# Altium PCB io.PcbDoc
Units mil, origin at the board's own origin, x right, y up, seen from the top; angles counter-clockwise.
Board outline 3899.84 x 3710 mil, 2 copper layers (Top Layer, Bottom Layer); 82 components, 45 nets, 216 pads, 36 vias.
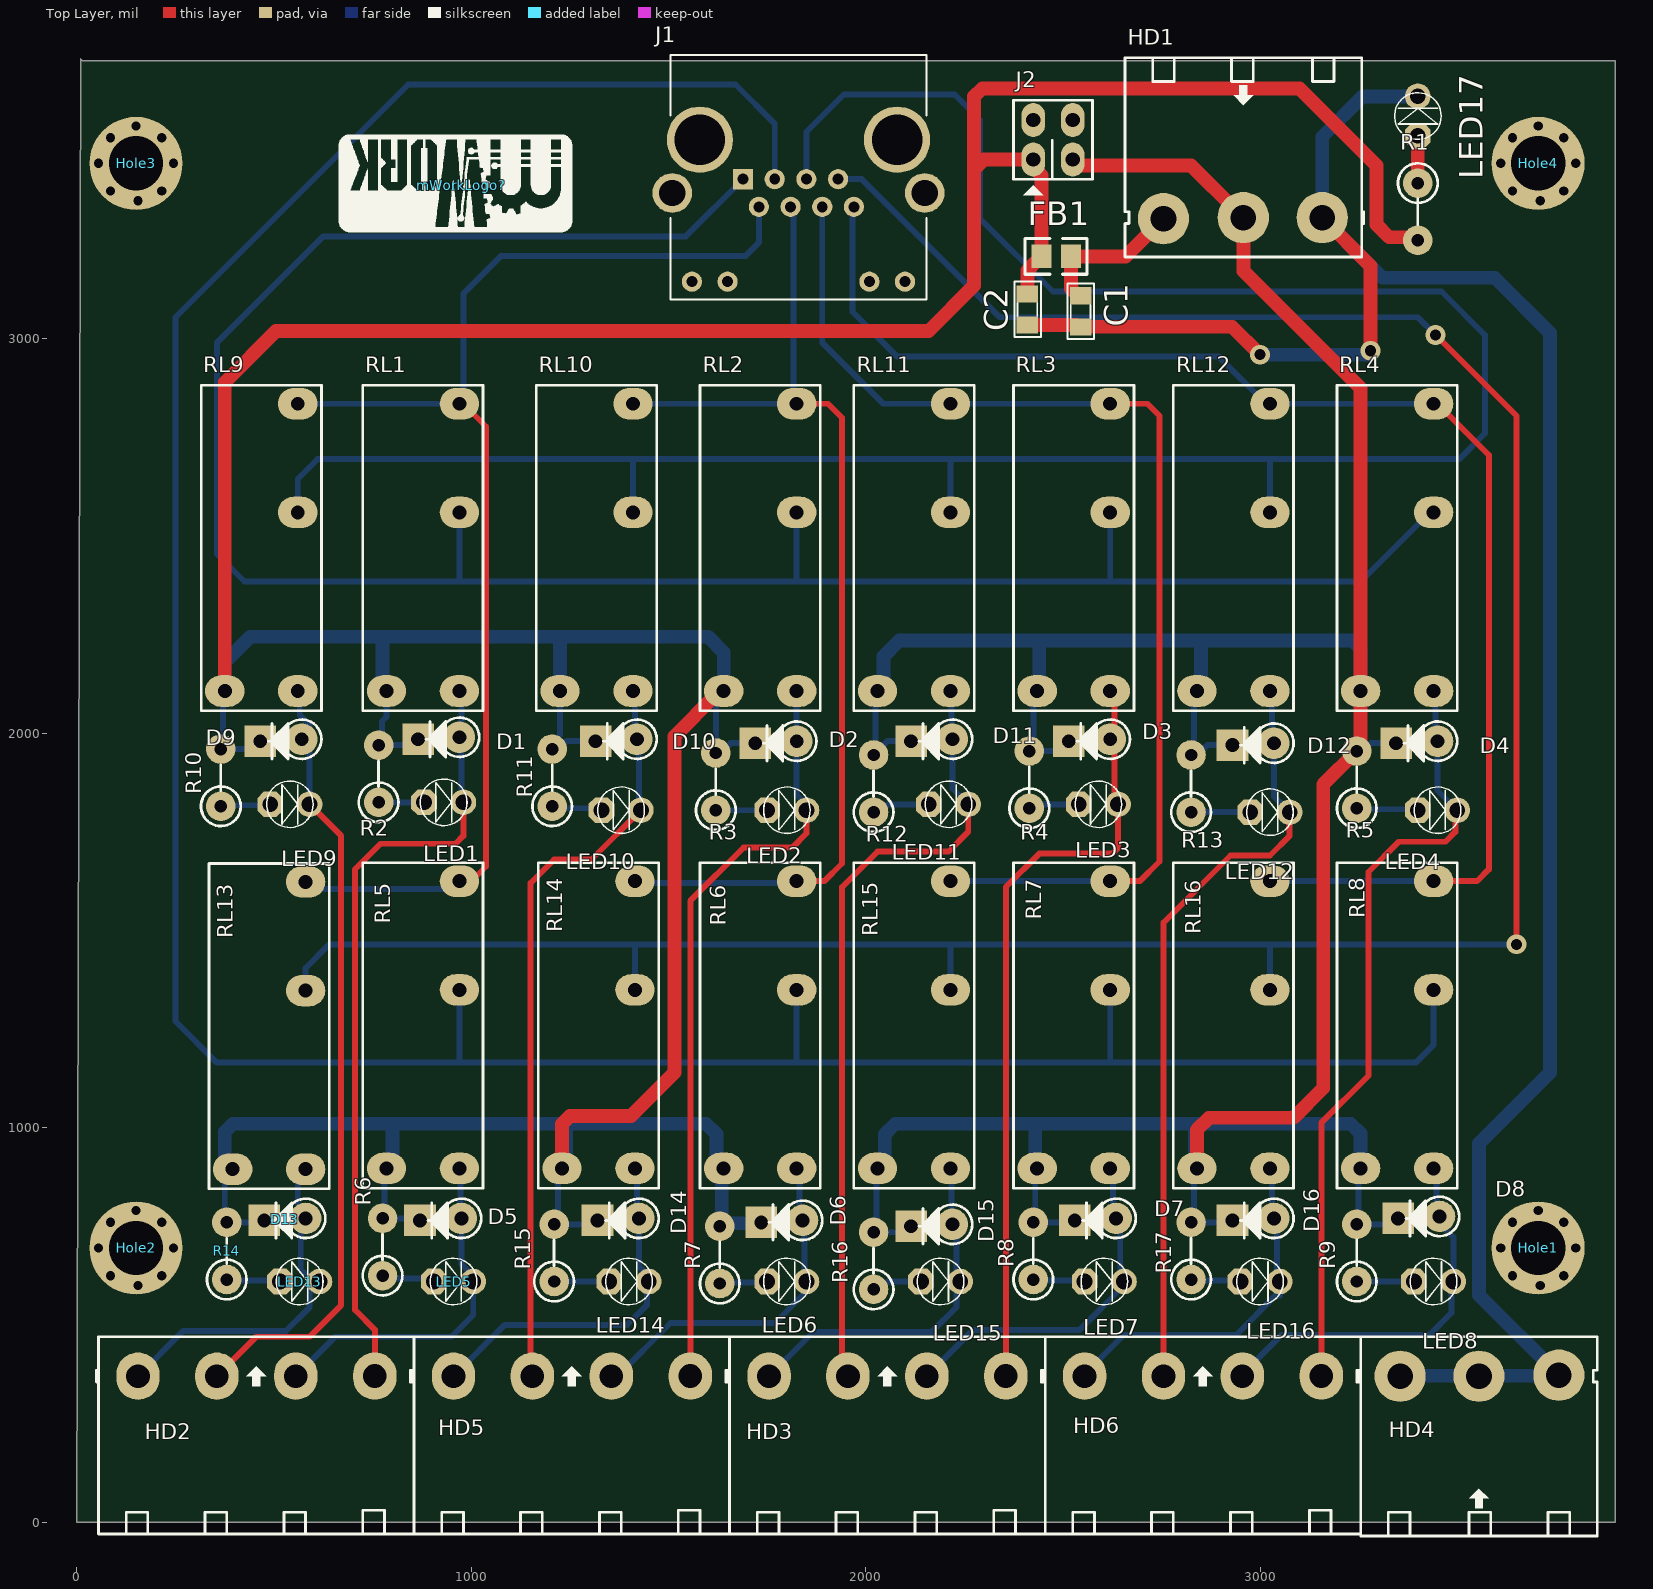
[diagram p0: Top Layer view]
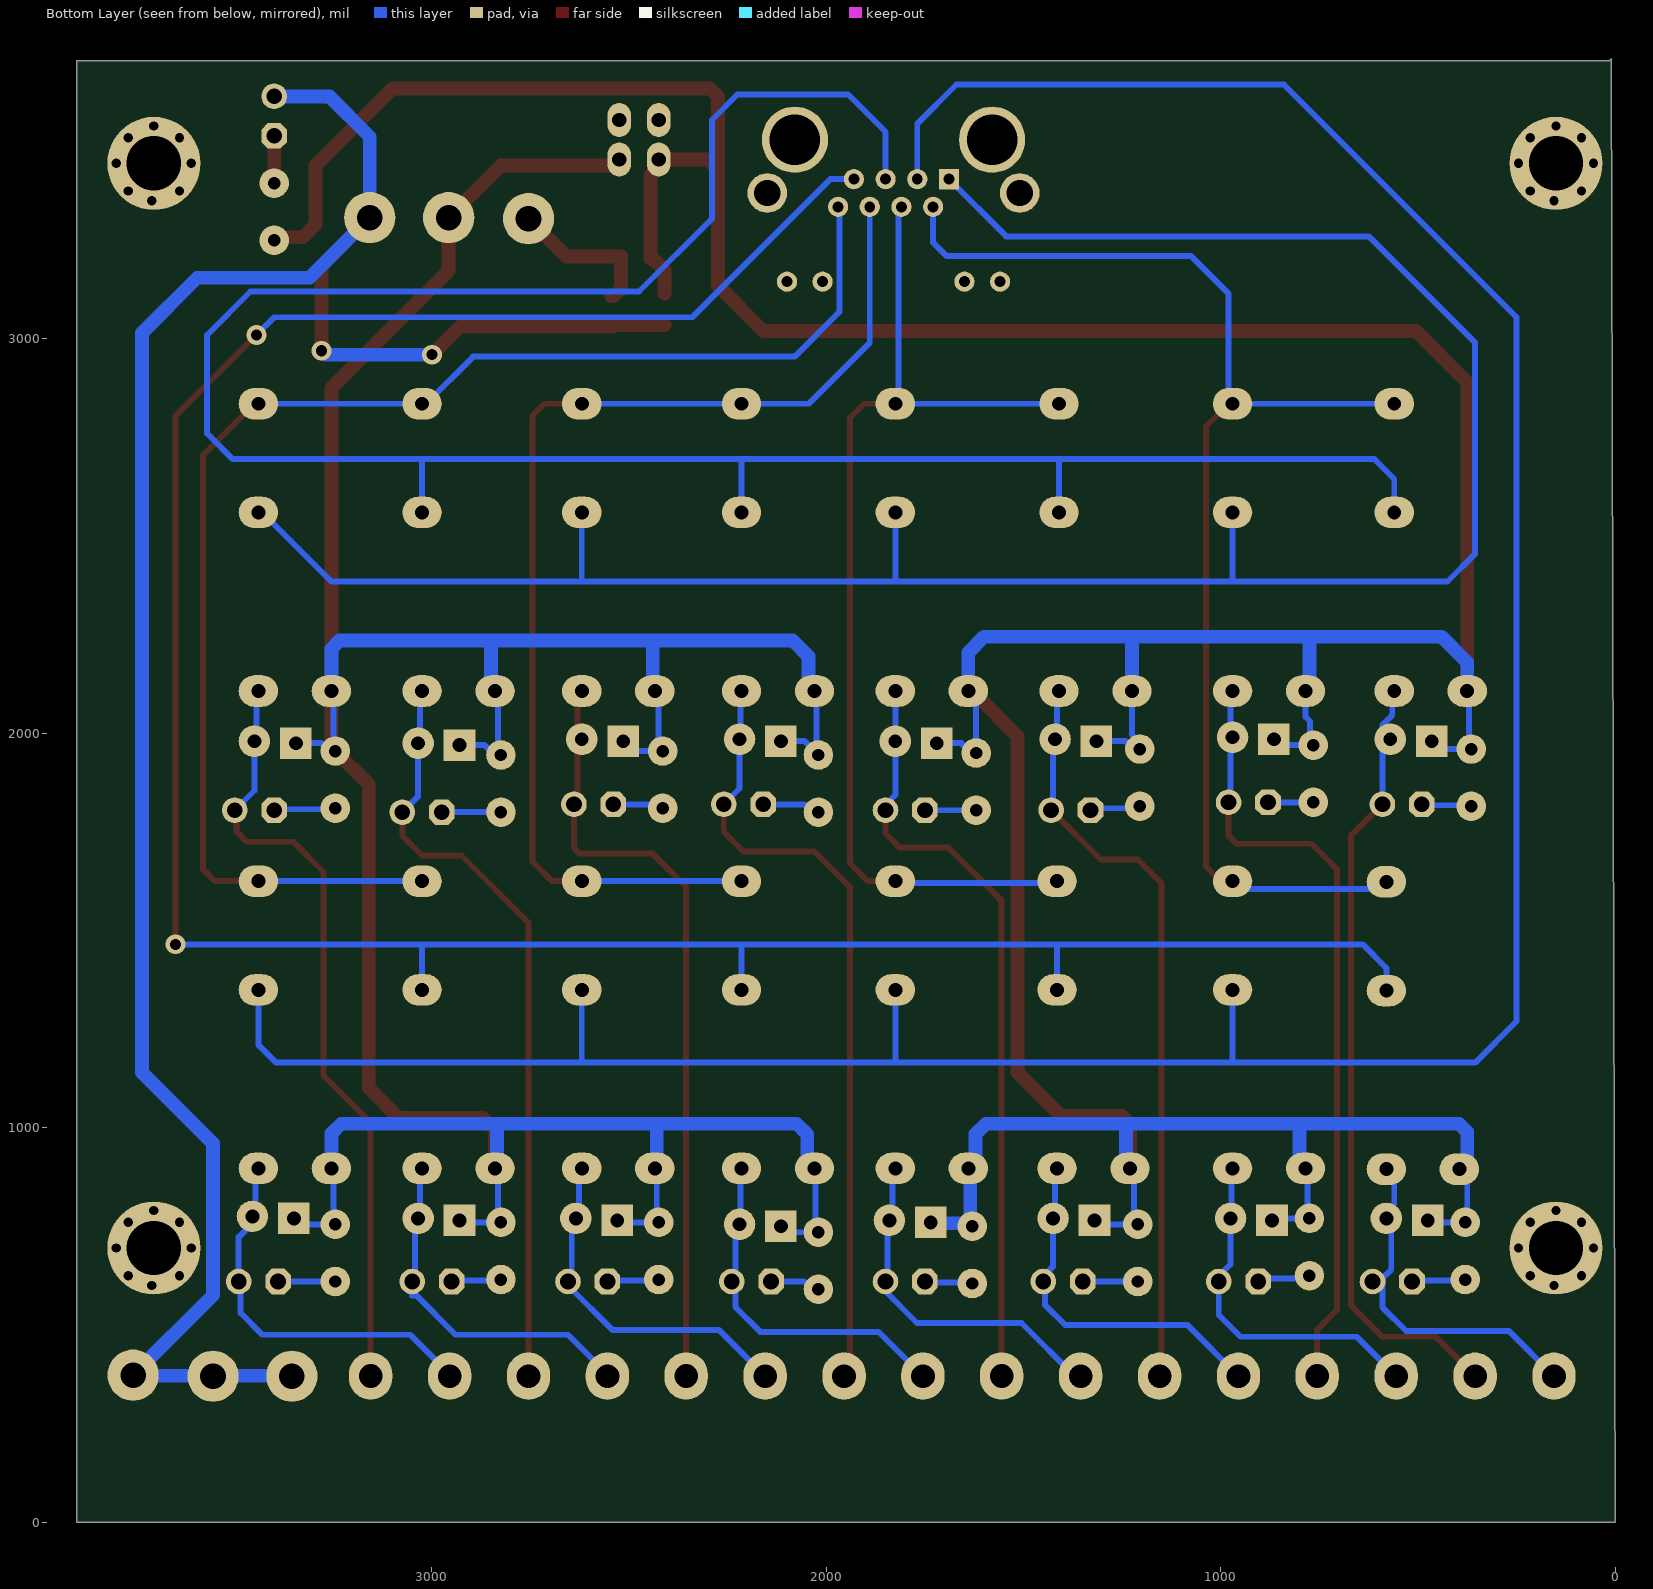
[diagram p1: Bottom Layer view, seen from below]

## Layer stack, top to bottom
Top Solder: solder mask 0.4, Solder Resist, Dk 3.5
Top Layer: signal copper 1.4
Dielectric 1: dielectric 12.6, FR-4, Dk 4.8
Bottom Layer: signal copper 1.4
Bottom Solder: solder mask 0.4, Solder Resist, Dk 3.5

## Board outline
10,3710 15,3705 3900,3705 3900,0 3860,0 0.16,0

## Design rules (kind name [scope] priority, off if disabled: settings)
Clearance [All] p1: gap=10 ignorepadtopadclearanceinfootprint=FALSE except(0: Arc-Hole Track-Hole SMDPad-Hole THPad-Hole Via-Hole Fill-Hole Poly-Hole Region-Hole Text-Hole)
PolygonConnect [All] p1: connectstyle=Relief reliefconductorwidth=10 reliefentries=4 polygonreliefangle="90 Angle" airgapwidth=10
RoomDefinition IO [InComponentClass('IO')] p1: confinementstyle=ConfineIn formatcopy=TRUE lockcomponents=FALSE outline 5560,-30 27090,-30 27090,915 5560,915
RoutingVias [All] p1: holewidth=28 width=50 viastyle="Through Hole" minholewidth=28 minwidth=50 maxholewidth=28 maxwidth=50
SolderMaskExpansion [All] p1: expansion=4 istentingtop=FALSE
Width [All] p1: maxlimit=35 minlimit=10 preferedwidth=15
30 further rules are at their usual default settings.

## Components (designator, comment, footprint, x,y, rotation, side; value= is the part's Value field where it differs from the comment)
C1 "CN" CN-SMD-0805 2545,3070 r90 top value=33pF
C2 "CN" CN-SMD-0805 2410,3075 r90 top value=33pF
D1 "Diode" DIO-1AN 915,1985 r0 top value=1N5007
D2 "Diode" DIO-1AN 1770,1975 r0 top value=1N5007
D3 "Diode" DIO-1AN 2565,1980 r0 top value=1N5007
D4 "Diode" DIO-1AN 3395,1975 r0 top value=1N5007
D5 "Diode" DIO-1AN 920,765 r0 top value=1N5007
D6 "Diode" DIO-1AN 1785,760 r0 top value=1N5007
D7 "Diode" DIO-1AN 2580,765 r0 top value=1N5007
D8 "Diode" DIO-1AN 3400,770 r0 top value=1N5007
D9 "Diode" DIO-1AN 515,1980 r0 top value=1N5007
D10 "Diode" DIO-1AN 1365,1980 r0 top value=1N5007
D11 "Diode" DIO-1AN 2165,1980 r0 top value=1N5007
D12 "Diode" DIO-1AN 2980,1970 r0 top value=1N5007
D13 "Diode" DIO-1AN 525,765 r0 top value=1N5007
D14 "Diode" DIO-1AN 1370,765 r0 top value=1N5007
D15 "Diode" DIO-1AN 2165,750 r0 top value=1N5007
D16 "Diode" DIO-1AN 2980,765 r0 top value=1N5007
FB1 "FB" Capacitor_805 2482.8,3209.24 r0 top
HD1 "Header 3" HED3T 3157.62,3307.62 r180 top
HD2 "Header 4" HED4T 154.94,369.94 r0 top
HD3 "Header 4" HED4T 1755,370 r0 top
HD4 "Header 3" HED3T 3355,370 r0 top
HD5 "Header 4" HED4T 954.94,369.94 r0 top
HD6 "Header 4" HED4T 2555,370 r0 top
Hole1 "Hole pad" HolePad1 3705,695 r90 top
Hole2 "Hole pad" HolePad1 150,695 r90 top
Hole3 "Hole pad" HolePad1 150,3445 r90 top
Hole4 "Hole pad" HolePad1 3705,3445 r90 top
J1 "615008142121" RJ45_8P8C 1829.61,3409.92 r180 top
J2 "Jumper 2x2" JP2X2 2425,3455 r0 top value="JP 2x2"
LED1 "LED" LED-3MM-RED 880,1825 r0 top value="LED 3 ly Single Colour"
LED2 "LED" LED-3MM-RED 1750,1805 r0 top value="LED 3 ly Single Colour"
LED3 "LED" LED-3MM-RED 2540,1820 r0 top value="LED 3 ly Single Colour"
LED4 "LED" LED-3MM-RED 3400,1805 r0 top value="LED 3 ly Single Colour"
LED5 "LED" LED-3MM-RED 905,610 r0 top value="LED 3 ly Single Colour"
LED6 "LED" LED-3MM-RED 1750,610 r0 top value="LED 3 ly Single Colour"
LED7 "LED" LED-3MM-RED 2555,610 r0 top value="LED 3 ly Single Colour"
LED8 "LED" LED-3MM-RED 3390,610 r0 top value="LED 3 ly Single Colour"
LED9 "LED" LED-3MM-RED 490,1820 r0 top value="LED 3 ly Single Colour"
LED10 "LED" LED-3MM-RED 1330,1805 r0 top value="LED 3 ly Single Colour"
LED11 "LED" LED-3MM-RED 2160,1820 r0 top value="LED 3 ly Single Colour"
LED12 "LED" LED-3MM-RED 2975,1800 r0 top value="LED 3 ly Single Colour"
LED13 "LED" LED-3MM-RED 515,610 r0 top value="LED 3 ly Single Colour"
LED14 "LED" LED-3MM-RED 1350,610 r0 top value="LED 3 ly Single Colour"
LED15 "LED" LED-3MM-RED 2140,610 r0 top value="LED 3 ly Single Colour"
LED16 "LED" LED-3MM-RED 2950,610 r0 top value="LED 3 ly Single Colour"
LED17 "LED" LED-3MM-RED 3400,3515 r90 top value="LED 3 ly Single Colour"
mWorkLogo? "LogoMwork" LogoMwork15*6 975,3390 r180 top
R1 "Res" RES-1/4WD 3400,3330 r270 top
R2 "Res" RES-1/4WD 765,1890 r90 top
R3 "Res" RES-1/4WD 1620,1870 r90 top
R4 "Res" RES-1/4WD 2415,1875 r90 top
R5 "Res" RES-1/4WD 3245,1875 r90 top
R6 "Res" RES-1/4WD 775,690 r90 top
R7 "Res" RES-1/4WD 1630,670 r90 top
R8 "Res" RES-1/4WD 2425,680 r90 top
R9 "Res" RES-1/4WD 3245,675 r90 top
R10 "Res" RES-1/4WD 365,1880 r90 top
R11 "Res" RES-1/4WD 1205,1880 r90 top
R12 "Res" RES-1/4WD 2020,1865 r90 top
R13 "Res" RES-1/4WD 2825,1865 r90 top
R14 "Res" RES-1/4WD 380,680 r90 top
R15 "Res" RES-1/4WD 1210,675 r90 top
R16 "Res" RES-1/4WD 2020,655 r90 top
R17 "Res" RES-1/4WD 2825,680 r90 top
RL1 "Relay 10A/12V" HF46F-G 970,2107.24 r180 top value="Relay SPDT, 10A, 12V"
RL2 "Relay 10A/12V" HF46F-G 1825,2107.24 r180 top value="Relay SPDT, 10A, 12V"
RL3 "Relay 10A/12V" HF46F-G 2620,2107.24 r180 top value="Relay SPDT, 10A, 12V"
RL4 "Relay 10A/12V" HF46F-G 3440,2107.24 r180 top value="Relay SPDT, 10A, 12V"
RL5 "Relay 10A/12V" HF46F-G 970,896.65 r180 top value="Relay SPDT, 10A, 12V"
RL6 "Relay 10A/12V" HF46F-G 1825,896.65 r180 top value="Relay SPDT, 10A, 12V"
RL7 "Relay 10A/12V" HF46F-G 2620,896.65 r180 top value="Relay SPDT, 10A, 12V"
RL8 "Relay 10A/12V" HF46F-G 3440,896.65 r180 top value="Relay SPDT, 10A, 12V"
RL9 "Relay 10A/12V" HF46F-G 560,2107.24 r180 top value="Relay SPDT, 10A, 12V"
RL10 "Relay 10A/12V" HF46F-G 1410,2107.24 r180 top value="Relay SPDT, 10A, 12V"
RL11 "Relay 10A/12V" HF46F-G 2215,2107.24 r180 top value="Relay SPDT, 10A, 12V"
RL12 "Relay 10A/12V" HF46F-G 3025,2107.24 r180 top value="Relay SPDT, 10A, 12V"
RL13 "Relay 10A/12V" HF46F-G 580,895 r180 top value="Relay SPDT, 10A, 12V"
RL14 "Relay 10A/12V" HF46F-G 1415,896.65 r180 top value="Relay SPDT, 10A, 12V"
RL15 "Relay 10A/12V" HF46F-G 2215,896.65 r180 top value="Relay SPDT, 10A, 12V"
RL16 "Relay 10A/12V" HF46F-G 3025,896.65 r180 top value="Relay SPDT, 10A, 12V"

## Footprints (in the part's own frame and the unit in brackets; to place one, negate y for a bottom-side part, rotate by r counter-clockwise, add the part's x,y. Pads: shape width x height; smd on the part's side, far side on the other; paste and mask are expansions set on the pad)
Capacitor_805 [mm]
  rect 1.3x1.5 smd: 1(0.95,0) 2(-0.95,0)
  silkscreen extent -2,-1.15 2,1.15, body extent -1,-0.63 1,0.62, height 0.78
CN-SMD-0805 [mil]
  rect 43.31x55 smd: 1(-39.36,0.01) 2(39.37,0.01)
  silkscreen extent -70,-34 70,33, body extent -39,-25 39,25, height 31
DIO-1AN [mil] "Diode 1A, W 100mil, L 150mil"
  round 80 hole 35: 1(55,5)
  rect 80x80 hole 35: 2(-50,0)
  silkscreen extent -30,-45 105,55, body extent -64,-50 104,55, height 252
HED3T [mil] "Header 3, 3 pin, hight 300mil, Pin to Pin 200, Colour Green"
  round 130 hole 65: 1(0,0) 2(200,0) 3(402.62,2.62)
  silkscreen extent -105,-405 500,100, body extent -95,-404 496,68, height 124
HED4T [mil] "Header 4, 4 pin, hight 300mil, Pin to Pin 200, Colour Green"
  oval 110x120 hole 60: 1(0,0) 2(200,0) 3(400.06,0.06) 4(600.39,0.39)
  silkscreen extent -105,-400 700,100, body extent -87,-406 690,66, height 334
HF46F-G [mm] "HF46F-G 24-HS1 Ro Le 24VDC 7A SPST-NO"
  oval 2.54x2.032 hole 0.9: 1(0,-11.5) 3(0,-18.5) 4(0,0) 5(4.7,0)
  silkscreen extent -1.52,-19.68 6.22,1.27, body extent -1.03,-19.47 5.97,0.93, height 15.3
HolePad1 [mm]
  round 6 hole 3.5: 1(0,0)
JP2X2 [mil]
  oval 60x86 hole 36: 1(0,0) 2(100,0) 3(100,100) 4(0,100)
  silkscreen extent -50,-91 150,150, body extent -50,-50 150,150, height 335
LED-3MM-RED [mil]
  oct 65x65 hole 40: 1(0,0)
  round 65 hole 40: 2(100,0)
  silkscreen extent -9,-59 109,59, body extent -27,-77 117,80, height 181
LogoMwork15*6 [mil] "15mm*6mm"
  silkscreen extent -281,-128 311,118
RES-1/4WD [mil]
  round 75 hole 31.5: 1(-65,0) 2(80,0)
  silkscreen extent -115,-50 40,50, body extent -112,-45 92,46, height 379
RJ45_8P8C [mm] "https://www.thegioiic.com/products/cong-rj45-cai-8pin-8p8c-co-led-16x16mm"
  rect 1.3x1.3 hole 0.7: 1(3.57,0.125)
  round 1.3 hole 0.7: 2(2.55,1.905) 3(1.53,0.125) 4(0.51,1.905) 5(-0.51,0.125) 6(-1.53,1.905) 7(-2.55,0.125) 8(-3.57,1.905) L1+(4.57,6.725) L1-(6.86,6.725) L2+(-6.86,6.725) L2-(-4.57,6.725)
  round 4.266 hole 3.25: S1(6.35,-2.415) S2(-6.35,-2.415)
  round 2.55 hole 1.7: S3(-8.125,1.015) S4(8.125,1.015)
  silkscreen extent -8.25,-7.88 8.25,7.88, body extent -7.87,-7.88 7.87,7.51, height 12.84

## Part data
D1 D2 D3 D4 D5 D6 D7 D8 D9 D10 D11 D12 D13 D14 D15 D16: "Default Diode", Code - JEDEC=DO-214-AB, Published=8-Jun-2000, Publisher="Altium Limited", Revision="July-2002: Re-released for DXP Platform."
HD1 HD4: library part Hed3, "Header 3 (Green)"
HD2 HD3 HD5 HD6: library part Hed4, "Header 4 (Green)"
J1: library part RJ45_8P8C, "Conn, Rj45 Jack, Shld, 1port, 8p8c, Cat5", Package=None, Availability=Unavailable, MF="WÃ¼rth Elektronik", MP=615008142121, Price=None, SnapEDA_Link=https://www.snapeda.com/parts/615008142121/W%C3%BCrth%20Elektronik/view-part/1118273/?ref=snap
J2: library part JP2x2
LED1 LED2 LED3 LED4 LED5 LED6 LED7 LED8 LED9 LED10 LED11 LED12 LED13 LED14 LED15 LED16 LED17: "LED Single colour Green and Red"
R1 R2 R3 R4 R5 R6 R7 R8 R9 R10 R11 R12 R13 R14 R15 R16 R17: Manufacturer="Generic Components", Class=Passive, Published=08/06/2000, Publisher="Altium Hobart Technology Centre", SubClass=R
RL1 RL2 RL3 RL4 RL5 RL6 RL7 RL8 RL9 RL10 RL11 RL12 RL13 RL14 RL15 RL16: library part "Relay 5", "Relay SPDT,10A - 12VDC 5 Pin"

## Via types
v1: diameter 39.37, hole 23.62, Top Layer to Bottom Layer, 32 vias
v2: diameter 50, hole 28, Top Layer to Bottom Layer, 4 vias

## Nets (pads, with @x,y where several pads share a name; then routed paths per layer and width w, separated by ;. In a path a pad name is that pad's centre, name@x,y a point inside that pad or via, vN(x,y) a via of type N, cw(c..) or ccw(c..) an arc to the next point about the centre after c; other vN are vias at no path point)
+12: C2.2 D1.2 D2.2 D5.2 D6.2 D9.2 D10.2 D13.2 D14.2 FB1.2 J2.1 R1.2 R2.2 R3.2 R6.2 R7.2 R10.2 R11.2 R14.2 R15.2 RL1.5 RL2.5 RL5.5 RL6.5 RL9.5 RL10.5 RL13.5 RL14.5 | length 12106.4
  Top Layer w35: RL9.5 374.96,2889.96 505,3020 2160,3020 2275,3135 2275,3430 ; RL14.5 1229.96,1009.5 1250.46,1030 1405,1030 1515,1140 1515,1992.28 1622.24,2099.53 1622.24,2107.24 RL2.5 ; C2.2 2409.99,3173.84 2433.37,3197.21 2437.31,3197.21 2445.4,3205.3 FB1.2 2445.4,3414.84 2425,3435.24 J2.1 2300,3455 2275,3430 ; R1.2 3392.35,3257.65 3327.35,3257.65 3295,3290 3295,3440 3100,3635 2295.5,3635 2275,3614.5 2275,3430
  Bottom Layer w15: RL13.5@374.96,896.65 374.96,765.04 R14.2 445,760 D13.2@450,765 ; RL9.5 369.98,2102.26 369.98,1964.98 R10.2 445,1960 D9.2 ; RL5.5 779.98,891.67 779.98,774.98 R6.2 865,770 D5.2 ; RL1.5 784.96,2041.71 773.25,2030 773.25,1978.25 R2.2 850,1970 D1.2 ; RL10.5 1224.96,1996.2 1205,1976.24 R11.2 1221.24,1960 1241.24,1980 D10.2 ; RL14.5 1219.98,886.67 1219.98,764.98 R15.2 1310,755 D14.2 ; RL2.5@1620.26,2107.24 1620.26,1950.26 R3.2 1632.5,1950 1657.5,1975 D2.2
  Bottom Layer w35: RL13.5@374.96,896.65 374.96,989.5 395.46,1010 800,1010 ; RL9.5 374.96,2180.04 439.92,2245 775,2245 ; RL5.5 800,911.69 800,1010 ; RL1.5 775,2117.2 775,2245 ; RL10.5 1225,2107.28 1225,2245 ; RL14.5 1240,906.69 1240,1010 ; R7.2 1634.98,754.98 1634.98,891.67 RL6.5 1625,911.61 1621.35,915.26 1621.35,983.65 1595,1010 1240,1010 ; R7.2@1637.5,757.5 1732.5,757.5 D6.2 ; RL2.5 1639.96,2205.04 1600,2245 1225,2245 ; 775,2245 1225,2245 ; 800,1010 1240,1010
+12V1: D3.2 D4.2 D7.2 D8.2 D11.2 D12.2 D15.2 D16.2 HD1.2 J2.2 R4.2 R5.2 R8.2 R9.2 R12.2 R13.2 R16.2 R17.2 RL3.5 RL4.5 RL7.5 RL8.5 RL11.5 RL12.5 RL15.5 RL16.5 | length 8785.2
  Top Layer w35: J2.2@2513.45,3455 2525,3443.45 2525,3440 2825.24,3440 2940.24,3325 2945,3325 2960,3310 HD1.2 2957.62,3172.38 3254.96,2875.04 RL4.5 3254.96,1964.96 R5.2 3160,1870 3160,1100 3085,1025 2870,1025 2839.96,994.96 RL16.5
  Bottom Layer w15: R12.2 R12.2@2024.98,1949.98 ; R16.2@2022.48,737.48 R16.2 R16.2@2027.48,735 ; RL15.5@2027.48,894.17 R16.2@2027.48,735 ; RL15.5@2029.96,876.65 RL15.5@2039.96,886.65 ; RL11.5 2024.98,2102.26 R12.2@2024.98,1949.98 ; D15.2 2100,735 R16.2@2027.48,735 ; D11.2 2055,1980 R12.2@2024.98,1949.98 ; RL7.5 2429.98,891.67 2429.98,764.98 R8.2 2525,760 D7.2 ; RL3.5 2424.98,2097.26 2424.98,1964.98 R4.2 2495,1955 2515,1975 D3.2 ; RL16.5 2832.48,889.17 2832.48,767.48 R17.2 2925,760 D16.2 ; RL12.5 2832.48,2099.76 2832.48,1952.48 R13.2 2841.24,1945 2866.24,1970 D12.2 ; RL8.5@3249.98,876.65 3249.98,759.98 R9.2 3335,755 D8.2 ; RL4.5 3249.98,2102.26 3249.98,1959.98 R5.2 3261.24,1955 3281.24,1975 D4.2
  Bottom Layer w35: RL15.5 2048.57,915.26 2048.57,983.57 2075,1010 2430,1010 ; RL11.5 2045,2122.28 2045,2195 2085,2235 2440,2235 ; RL7.5 2430,901.61 2430,1010 ; RL3.5 2440,2112.28 2440,2235 ; RL16.5 2835,901.61 2835,1010 ; RL12.5 2850,2117.28 2850,2235 ; RL8.5 3254.96,984.96 3229.92,1010 2835,1010 ; RL4.5 3254.96,2214.5 3234.46,2235 2850,2235 ; 2430,1010 2835,1010 ; 2440,2235 2850,2235
COL1: J1.1 RL1.1 RL2.1 RL3.1 RL4.1 | length 5754.5
  Bottom Layer w15: 965,2385 970,2390 RL1.1 ; J1.1 1544.06,3260 625,3260 355,2990 355,2455 425,2385 2620,2385 ; 1825,2385 RL2.1 ; RL3.1 2620,2385 ; RL4.1 3430,2560 3255,2385 2620,2385
COL2: J1.3 RL5.1 RL6.1 RL7.1 RL8.1 | length 7679.5
  Bottom Layer w15: RL5.1 970,1170 965,1165 ; J1.3 1769.37,3545.63 1670,3645 840,3645 250,3055 250,1270 355,1165 965,1165 ; RL6.1 1825,1170 1820,1165 ; RL7.1 2620,1165 ; RL8.1 3440,1210 3395,1165 2620,1165 ; 965,1165 1820,1165 ; 1820,1165 2620,1165
COL3: J1.5 RL9.1 RL10.1 RL11.1 RL12.1 | length 6076.2
  Bottom Layer w15: RL9.1 560,2645 610,2695 1410,2695 ; RL10.1 1410,2695 ; J1.5 1849.68,3524.69 1945,3620 2225,3620 2290,3555 2290,3305 2475,3120 3460,3120 3570,3010 3570,2760 3505,2695 3025,2695 ; RL11.1 2215,2695 ; RL12.1 3025,2695 ; 1410,2695 3025,2695
COl4: J1.7 RL13.1 RL14.1 RL15.1 RL16.1 | length 6807.4
  Top Layer w15: v2(3445,3010) 3650,2805 v2(3650,1465)
  Bottom Layer w15: RL13.1 580,1405 640,1465 1415,1465 ; RL14.1 1415,1465 ; J1.7 1990,3405 2340,3055 3400,3055 v2(3445,3010) ; RL15.1 2215,1465 ; RL16.1 3025,1465 ; v2(3650,1465) 3025,1465 ; 1415,1465 2215,1465 ; 2215,1465 3025,1465
GND: C1.1 C2.1 HD1.1 HD4.1 HD4.2 HD4.3 LED17.2 | length 5686.7
  Top Layer w35: C2.1 2534.15,3035.64 2539.15,3030.64 C1.1 2929.36,3030.64 v2(3000,2960) ; HD1.1 3280,3185.24 v2(3280,2970)
  Bottom Layer w35: v2(3000,2960) 3270,2960 v2(3280,2970) ; HD4.1 3356.31,371.31 3555,371.31 3756.31,371.31 HD4.3 3555,575.24 3555,960 3735,1140 3735,3015 3595,3155 3310.24,3155 HD1.1 3157.62,3512.62 3260,3615 LED17.2
IN1: D1.1 HD2.4 LED1.2 RL1.4 | length 2001.3
  Top Layer w15: HD2.4 755.33,487.73 705,538.06 705,1655 770,1720 960,1720 980,1740 LED1.2
  Bottom Layer w15: RL1.4@960,2097.24 RL1.4 975,2102.24 975,1830 LED1.2
IN2: D5.1 HD2.3 LED5.2 RL5.4 | length 895.4
  Bottom Layer w15: HD2.3 655,470 950,470 1005,525 LED5.2@1005,605 ; RL5.4 972.5,894.15 972.5,772.5 D5.1 975,653.53 1005,623.53 LED5.2
IN3: D9.1 HD2.2 LED9.2 RL9.4 | length 2024.3
  Top Layer w15: HD2.2 455,470 590,470 670,550 670,1740 LED9.2 ; D9.1 D9.1@580.43,1974.57 ; LED9.2@580.43,1834.57 LED9.2@592.5,1822.5
  Bottom Layer w15: RL9.4 565,2102.24 565,2046.12 590,2021.12 LED9.2
IN4: D13.1 HD2.1 LED13.2 RL13.4 | length 871.7
  Bottom Layer w15: HD2.1 270,485 530,485 590,545 590,610 590,617.78 567.56,640.22 567.56,800.03 560,807.59 RL13.4@560,896.65
IN5: D2.1 HD5.4 LED2.2 RL2.4 | length 1977
  Top Layer w15: HD5.4 1555.33,1575.33 1690,1710 1813.5,1710 1850,1746.5 LED2.2 LED2.2@1840.43,1814.57 ; RL2.4 RL2.4@1840.43,2091.81
  Bottom Layer w15: RL2.4 D2.1 1825,1843.53 1850,1818.53 LED2.2
IN6: D6.1 HD5.3 LED6.2 RL6.4 | length 902.9
  Bottom Layer w15: HD5.3 1370,370 1505,505 1770,505 LED6.2@1850,585 ; RL6.4@1809.57,881.22 RL6.4 1832.5,889.15 1832.5,772.5 D6.1 1845,760 1845,615 LED6.2
IN7: D10.1 HD5.2 LED10.2 RL10.4 | length 1919.3
  Top Layer w15: HD5.2 1150,374.88 1150,1620 1210,1680 1305,1680 LED10.2
  Bottom Layer w15: RL10.4 1415,2102.24 1415,1990 D10.1 1425,1980 1425,1810 LED10.2
IN8: D14.1 HD5.1 LED14.2 RL14.4 | length 922.9
  Bottom Layer w15: HD5.1 1085,500 1395,500 1445,550 1445,600 LED14.2@1450,605 ; RL14.4 1420,891.65 1420,775 D14.1 1425,648.53 1450,623.53 LED14.2
IN9: D3.1 HD3.4 LED3.2 RL3.4 | length 1992
  Top Layer w15: HD3.4 2355.39,1610.39 2440,1695 2625,1695 2640,1710 LED3.2 2630.43,1829.57 LED3.2@2630.43,1839.57 ; RL3.4 2630.43,2096.81 LED3.2@2630.43,1839.57 ; LED3.2@2645,1825 LED3.2@2630.43,1839.57
IN10: D7.1 HD3.3 LED7.2 RL7.4 | length 896.3
  Bottom Layer w15: HD3.3 2272.5,487.5 2542.5,487.5 LED7.2@2655,600 ; RL7.4 2627.5,889.15 2627.5,777.5 D7.1 2645.43,759.57 2645.43,619.57 LED7.2
IN11: D11.1 HD3.2 LED11.2 RL11.4 | length 2000.1
  Top Layer w15: HD3.2 1940,385 1940,1610 2030,1700 2210,1700 2260,1750 LED11.2
  Bottom Layer w15: RL11.4 2217.5,2104.74 2217.5,1987.5 D11.1 2220,1860 LED11.2
IN12: D15.1 HD3.1 LED15.2 RL15.4 | length 898.8
  Bottom Layer w15: HD3.1 1867.5,482.5 2167.86,482.5 2230.43,545.08 2230.43,585.43 LED15.2@2240,595 ; RL15.4 2217.5,894.15 2217.5,757.5 D15.1 2230.43,744.57 2230.43,619.57 LED15.2
IN13: D4.1 HD6.4 LED4.2 RL4.4 | length 1973.9
  Top Layer w15: HD6.4 3155.39,1012.34 3275,1131.94 3275,1648.52 3351.48,1725 3470,1725 3495,1750 3495,1800 LED4.2
  Bottom Layer w15: RL4.4 3445,2102.24 3445,1985 D4.1 3450,1855 LED4.2
IN14: D8.1 HD6.3 LED8.2 RL8.4 | length 963.6
  Bottom Layer w15: HD6.3 2955.06,375.06 3055,475 3430,475 3485,530 3485,580 LED8.2@3490,585 ; RL8.4 3447.5,889.15 3447.5,782.5 D8.1 3455,757.41 3490,722.41 LED8.2
IN15: D12.1 HD6.2 LED12.2 RL12.4 | length 1949.1
  Top Layer w15: HD6.2 2755,1520 2925,1690 3025,1690 3075,1740 LED12.2
  Bottom Layer w15: RL12.4 3030,2102.24 3030,1980 D12.1 3035,1840 LED12.2
IN16: D16.1 HD6.1 LED16.2 RL16.4 | length 889.9
  Bottom Layer w15: HD6.1 2555,375 2655,475 2940,475 3040,575 3050,575 LED16.2@3050,585 ; RL16.4 3030,891.65 3030,775 D16.1 3042.5,762.5 3042.5,617.5 LED16.2
NetC1_2: C1.2 FB1.1 HD1.3 | length 388.7
  Top Layer w35: C1.2@2545,3108.74 2539.15,3108.74 2520.2,3127.69 FB1.1 2659.24,3209.24 HD1.3
NetLED1_1: LED1.1 R2.1 | length 115
  Bottom Layer w15: R2.1 LED1.1
NetLED2_1: LED2.1 R3.1 | length 130
  Bottom Layer w15: R3.1 LED2.1
NetLED3_1: LED3.1 R4.1 | length 129.1
  Bottom Layer w15: R4.1 2425,1820 LED3.1
NetLED4_1: LED4.1 R5.1 | length 157.1
  Bottom Layer w15: R5.1 3247.5,1807.5 3397.5,1807.5 LED4.1
NetLED5_1: LED5.1 R6.1 | length 136.2
  Bottom Layer w15: R6.1 782.5,617.5 897.5,617.5 LED5.1
NetLED6_1: LED6.1 R7.1 | length 150.4
  Bottom Layer w15: R7.1@1640,595 R7.1 1632.5,607.5 1747.5,607.5 LED6.1 ; LED6.1@1750,585 LED6.1@1760,595
NetLED7_1: LED7.1 R8.1 | length 132.1
  Bottom Layer w15: R8.1 2427.5,612.5 2552.5,612.5 LED7.1
NetLED8_1: LED8.1 R9.1 | length 145
  Bottom Layer w15: R9.1 LED8.1
NetLED9_1: LED9.1 R10.1 | length 127.1
  Bottom Layer w15: R10.1 367.5,1817.5 487.5,1817.5 LED9.1
NetLED10_1: LED10.1 R11.1 | length 129.1
  Bottom Layer w15: R11.1 1210,1810 1325,1810 LED10.1
NetLED11_1: LED11.1 R12.1 | length 148.3
  Bottom Layer w15: R12.1 2036.24,1800 2056.24,1820 LED11.1
NetLED12_1: LED12.1 R13.1 | length 150
  Bottom Layer w15: R13.1 LED12.1
NetLED13_1: LED13.1 R14.1 | length 137.1
  Bottom Layer w15: R14.1 382.5,612.5 512.5,612.5 LED13.1
NetLED14_1: LED14.1 R15.1 | length 140
  Bottom Layer w15: R15.1 LED14.1
NetLED15_1: LED15.1 R16.1 | length 128.3
  Bottom Layer w15: R16.1 2036.24,590 2056.24,610 LED15.1
NetLED16_1: LED16.1 R17.1 | length 127.1
  Bottom Layer w15: R17.1 2827.5,612.5 2947.5,612.5 LED16.1
NetLED17_1: LED17.1 R1.1 | length 120
  Top Layer w35: R1.1 LED17.1
ROW1: J1.2 RL1.3 RL5.3 RL9.3 RL13.3 | length 3327
  Top Layer w15: RL1.3 980,2835.59 1037.5,2778.09 1037.5,1662.46 980.04,1605 RL5.3@970.04,1605
  Bottom Layer w15: RL13.3@560,1605 RL5.3@970.04,1605 ; RL9.3@582.44,2858.03 RL9.3 RL1.3 979.84,2845.43 979.84,3114.84 1075,3210 1695,3210 1729.21,3244.21 J1.2
ROW2: J1.4 RL2.3 RL6.3 RL10.3 RL14.3 | length 2728.3
  Top Layer w15: RL6.3 1895,1625 1940,1670 1940,2800 1904.41,2835.59 RL2.3
  Bottom Layer w15: RL10.3 RL2.3 1816.45,2844.14 1816.45,3328 J1.4 ; RL14.3 1420,1620 1820,1620 RL6.3
ROW3: J1.6 RL3.3 RL7.3 RL11.3 RL15.3 | length 2957.3
  Top Layer w15: RL7.3 2695,1625 2745,1675 2745,2805 2714.41,2835.59 RL3.3
  Bottom Layer w15: J1.6 1889.84,2990.16 2044.41,2835.59 RL11.3 RL3.3 ; RL15.3 RL7.3
ROW4: J1.8 RL4.3 RL8.3 RL12.3 RL16.3 | length 3649.8
  Top Layer w15: RL8.3 3550,1625 3580,1655 3580,2705.59 3450,2835.59 RL4.3
  Bottom Layer w15: J1.8 1966.44,3331.2 1966.44,3068.56 2080,2955 2895.59,2955 3015,2835.59 RL12.3 RL4.3 ; RL16.3 RL8.3
pads on no net: Hole1.1 Hole2.1 Hole3.1 Hole4.1 J1.L1+ J1.L1- J1.L2+ J1.L2- J1.S1 J1.S2 J1.S3 J1.S4 J2.3 J2.4
copper on no net:
  other v1: 155,600 3710,600 85,625 215,625 3640,625 3770,625 55,695 245,695 3610,695 3800,695 85,760 215,760 3640,760 3770,760 150,790 3705,790 155,3350 3710,3350 85,3375 215,3375 3640,3375 3770,3375 55,3445 245,3445 3610,3445 3800,3445 85,3510 215,3510 3640,3510 3770,3510 150,3540 3705,3540

## Silkscreen, mask and mechanical layers (free items; w line width, h text height)
Mechanical 1:
  the board outline again, w12

## Dimensions
3900,3705 to 3900,0 on Top Layer
3910,3710 to 10,3745 on Top Layer
10,3710 to 3920,4075 on Top Layer
-135,-50 to -20,3705 on Top Layer